# Allegro board DAQ_BACKPLANE.brd
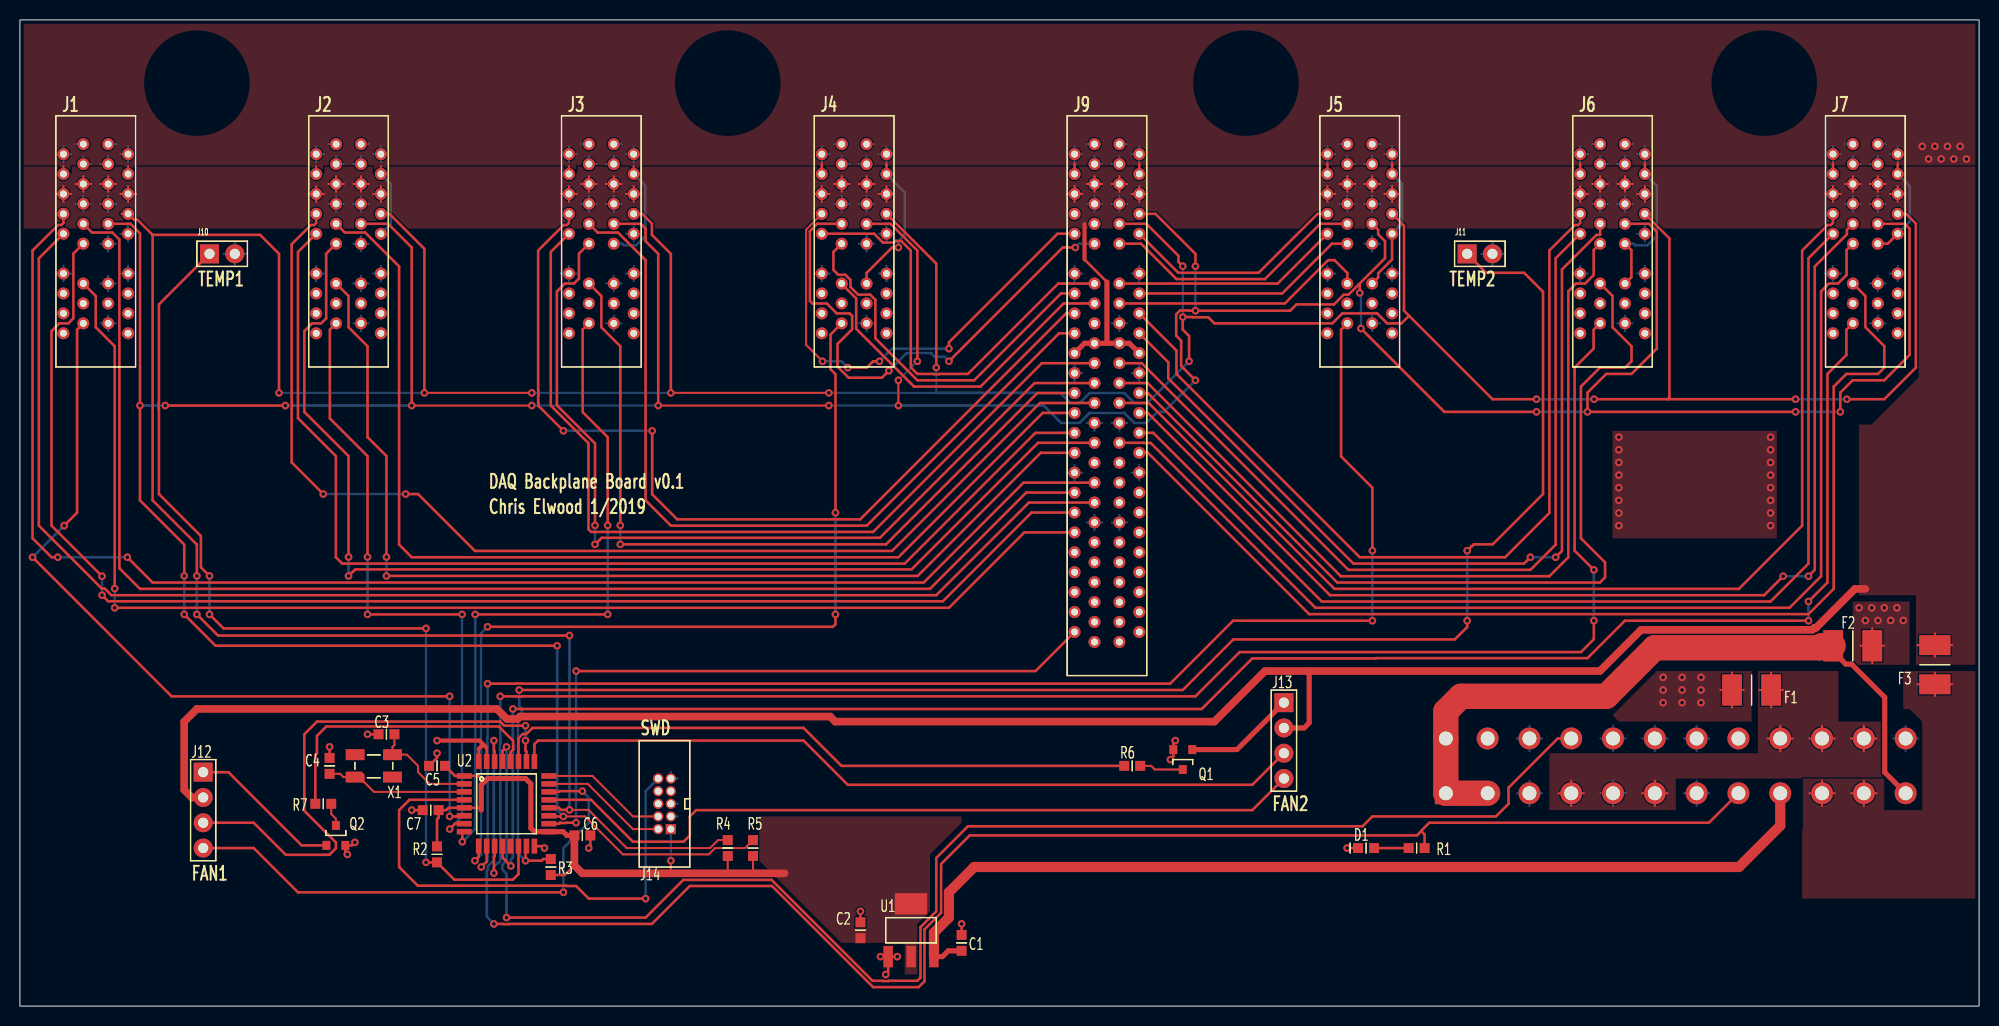
[diagram p0: board, top side]
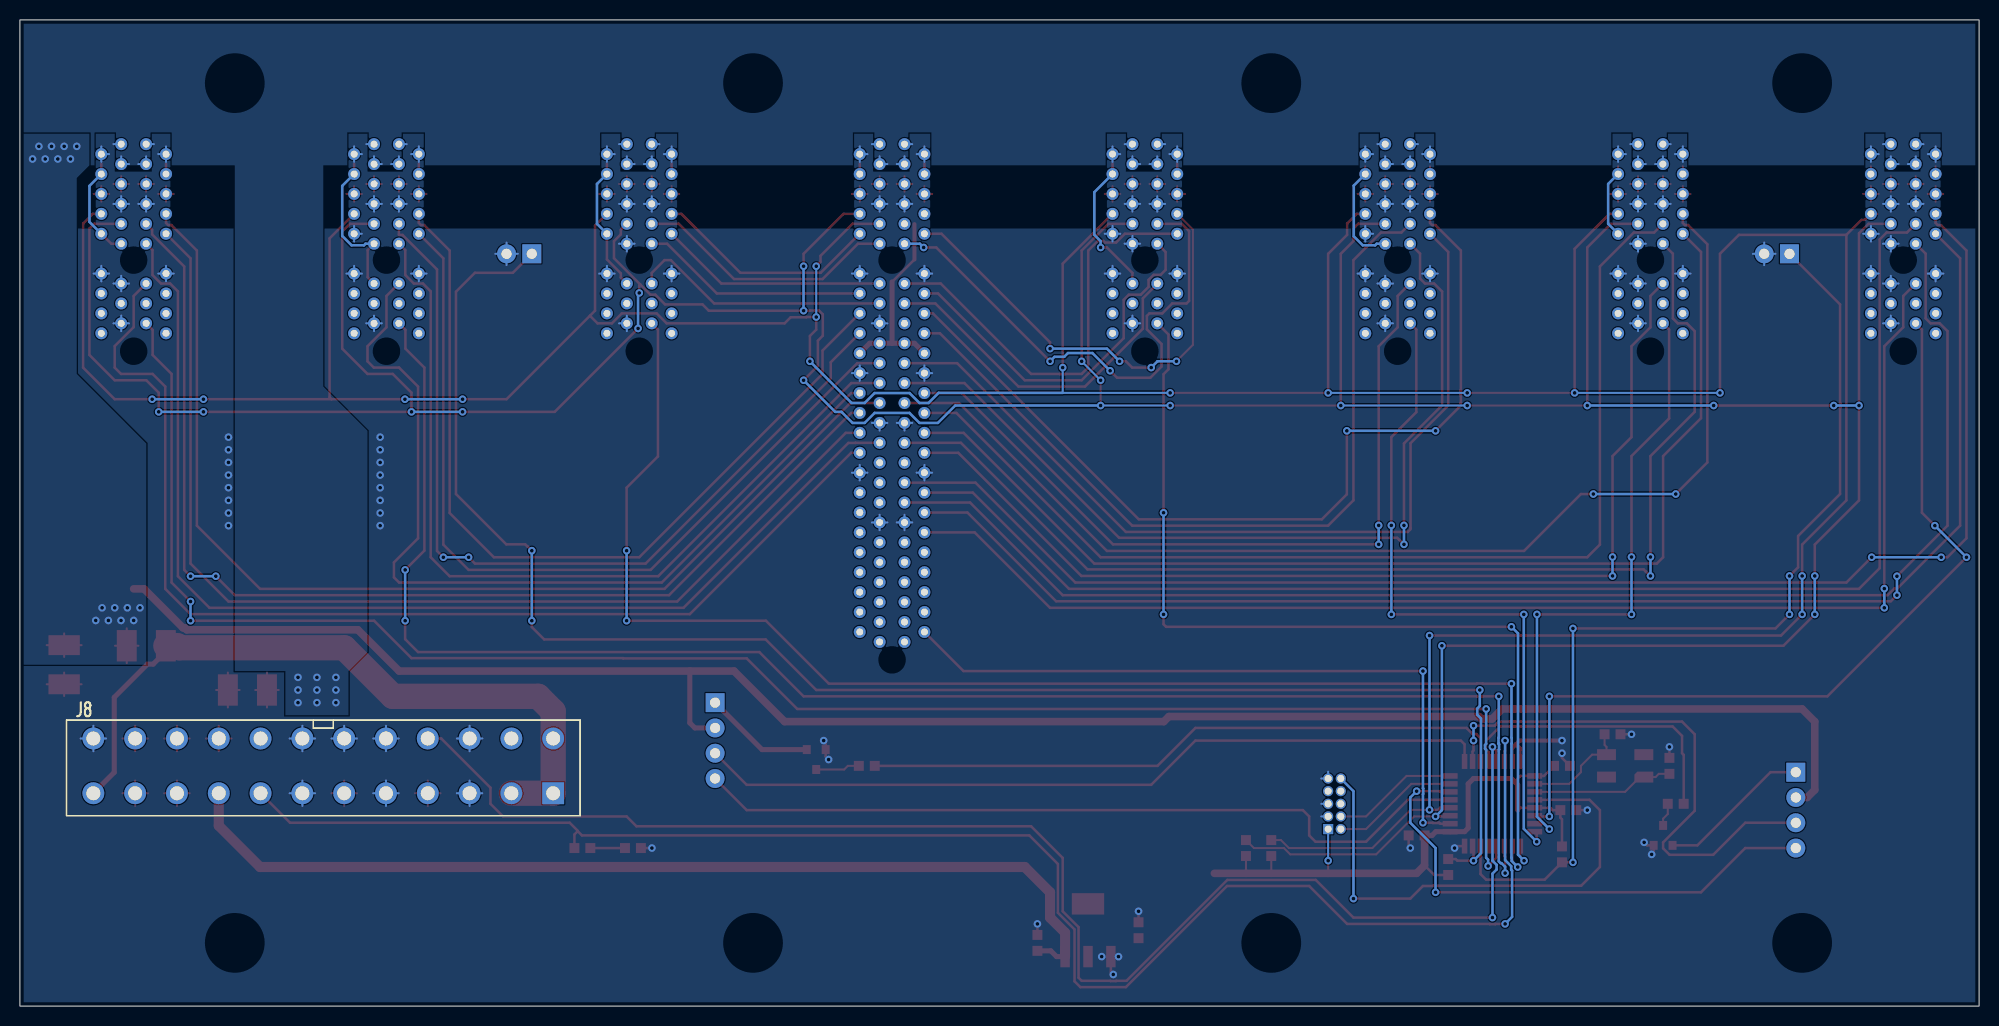
[diagram p1: board, bottom side, seen from below]

Outline 196.85 x 99.06 mm; copper layers: TOP, BOTTOM. Coordinates in mm from the lower left corner of the outline.
Outline path: rectangle 0,0 196.85,99.06

## Design rules (mm)
constraint set DEFAULT: min track width 0.203

## Placement (name value [footprint] x y rotation side)
C1  0.1uF  [CAP_0603]  94.61 6.35 90 top
C2  1uF  [CAP_0603]  84.45 7.62 90 top
C3  8pF  [CAP_0603]  36.83 27.3 0 top
C4  8pF  [CAP_0603]  31.11 24.13 270 top
C5  0.1uF  [CAP_0603]  41.91 24.13 180 top
C6  0.1uF  [CAP_0603]  56.51 17.15 0 top
C7  0.1uF  [CAP_0603]  41.27 19.69 180 top
D1  PWR_OK  [LED_0603]  135.25 15.88 0 top
F1  10A  [FUSE_0679H]  173.99 31.75 180 top
F2  10A  [FUSE_0679H]  184.15 36.2 0 top
F3  10A  [FUSE_0679H]  192.41 34.29 90 top
J1  DAQ_PCIE_TH_36  [CONN_PCIE_36_TH]  7.62 74.93 0 top
J2  DAQ_PCIE_TH_36  [CONN_PCIE_36_TH]  33.02 74.93 0 top
J3  DAQ_PCIE_TH_36  [CONN_PCIE_36_TH]  58.42 74.93 0 top
J4  DAQ_PCIE_TH_36  [CONN_PCIE_36_TH]  83.82 74.93 0 top
J5  DAQ_PCIE_TH_36  [CONN_PCIE_36_TH]  134.62 74.93 0 top
J6  DAQ_PCIE_TH_36  [CONN_PCIE_36_TH]  160.02 74.93 0 top
J7  DAQ_PCIE_TH_36  [CONN_PCIE_36_TH]  185.42 74.93 0 top
J8  ATX_PWR_24pin  [MINI-FIT_JR_24]  166.37 24.13 180 bottom
J9  DAQ_EDGE_98  [CONN_PCIE_98_TH]  109.22 74.93 0 top
J10  TEMP1  [HDR_1X2]  19.05 75.56 90 top
J11  TEMP2  [HDR_1X2]  145.41 75.56 90 top
J12  FAN1  [HDR_1X4]  18.41 23.5 0 top
J13  FAN2  [HDR_1X4]  127 30.48 0 top
J14  SWD_HEADER_SHD  [HDR_0P5IN_2X5_SHD]  64.77 20.32 180 top
NOREF  -  [unnamed]  123.19 92.71 0 top
NOREF#2  -  [unnamed]  175.26 92.71 0 top
NOREF#3  -  [unnamed]  17.78 92.71 0 top
NOREF#4  -  [unnamed]  71.12 92.71 0 top
NOREF#5  -  [unnamed]  123.19 6.35 0 top
NOREF#6  -  [unnamed]  17.78 6.35 0 top
NOREF#7  -  [unnamed]  175.26 6.35 0 top
NOREF#8  -  [unnamed]  71.12 6.35 0 top
Q1  DMN2075U  [SOT-23]  116.84 24.77 180 top
Q2  DMN2075U  [SOT-23]  31.75 17.15 0 top
R1  330  [RES_0603]  140.33 15.88 180 top
R2  10K  [RES_0603]  41.91 15.24 90 top
R3  10K  [RES_0603]  53.34 13.97 270 top
R4  4.7K  [RES_0603]  71.12 15.88 90 top
R5  4.7K  [RES_0603]  73.66 15.88 90 top
R6  1K  [RES_0603]  111.76 24.13 0 top
R7  1K  [RES_0603]  30.48 20.32 0 top
U1  LM1117MP-3,3  [SOT-223-3]  89.53 7.62 0 top
U2  STM32F0XXKXT  [QFP32]  48.89 20.32 0 top
X1  12 MHz  [CRYSTAL_5X3]  35.56 24.13 180 top

## Library data of the parts
C1-C7 = CAP NP
D1 = LED
F1-F3 = FUSE_SMT_0679H
J1-J7 = DAQ_PCIE_TH_36
J8 = ATX_PWR_24pin
J9 = DAQ_EDGE_98
J10 J11 = HDR_1X2
J12 J13 = HDR_1X4
J14 = SWD_HEADER_SHD
Q1 Q2 = DMN2075U
R1-R7 = RESISTOR
U1 = LM1117MP-3,3
U2 = STM32F0XXKXT
X1 = CRYSTAL_5X3_12MHZ

## Footprints (pads in the part's own frame, mm; a bottom-side part is the same pattern mirrored in y, then rotated)
CAP_0603
  rect 1x1 smd: 1(-0.8,0) 2(0.8,0)
CONN_PCIE_36_TH
  round 0 hole 2.35 unplated: (0,0) (0,-9.15)
  round 1.2 hole 0.7: A1(1.25,11.65) A2(3.25,10.65) A3(1.25,9.65) A4(3.25,8.65) A5(1.25,7.65) A6(3.25,6.65) A7(1.25,5.65) A8(3.25,4.65) A9(1.25,3.65) A10(3.25,2.65) A11(1.25,1.65) A12(3.25,-1.35) A13(1.25,-2.35) A14(3.25,-3.35) A15(1.25,-4.35) A16(3.25,-5.35) A17(1.25,-6.35) A18(3.25,-7.35) B1(-1.25,11.65) B2(-3.25,10.65) B3(-1.25,9.65) B4(-3.25,8.65) B5(-1.25,7.65) B6(-3.25,6.65) B7(-1.25,5.65) B8(-3.25,4.65) B9(-1.25,3.65) B10(-3.25,2.65) B11(-1.25,1.65) B12(-3.25,-1.35) B13(-1.25,-2.35) B14(-3.25,-3.35) B15(-1.25,-4.35) B16(-3.25,-5.35) B17(-1.25,-6.35) B18(-3.25,-7.35)
CONN_PCIE_98_TH
  round 0 hole 2.35 unplated: (0,0) (0,-40.15)
  round 1.2 hole 0.7: A1(1.25,11.65) A2(3.25,10.65) A3(1.25,9.65) A4(3.25,8.65) A5(1.25,7.65) A6(3.25,6.65) A7(1.25,5.65) A8(3.25,4.65) A9(1.25,3.65) A10(3.25,2.65) A11(1.25,1.65) A12(3.25,-1.35) A13(1.25,-2.35) A14(3.25,-3.35) A15(1.25,-4.35) A16(3.25,-5.35) A17(1.25,-6.35) A18(3.25,-7.35) A19(1.25,-8.35) A20(3.25,-9.35) A21(1.25,-10.35) A22(3.25,-11.35) A23(1.25,-12.35) A24(3.25,-13.35) A25(1.25,-14.35) A26(3.25,-15.35) A27(1.25,-16.35) A28(3.25,-17.35) A29(1.25,-18.35) A30(3.25,-19.35) A31(1.25,-20.35) A32(3.25,-21.35) A33(1.25,-22.35) A34(3.25,-23.35) A35(1.25,-24.35) A36(3.25,-25.35) A37(1.25,-26.35) A38(3.25,-27.35) A39(1.25,-28.35) A40(3.25,-29.35) A41(1.25,-30.35) A42(3.25,-31.35) A43(1.25,-32.35) A44(3.25,-33.35) A45(1.25,-34.35) A46(3.25,-35.35) A47(1.25,-36.35) A48(3.25,-37.35) A49(1.25,-38.35) B1(-1.25,11.65) B2(-3.25,10.65) B3(-1.25,9.65) B4(-3.25,8.65) B5(-1.25,7.65) B6(-3.25,6.65) B7(-1.25,5.65) B8(-3.25,4.65) B9(-1.25,3.65) B10(-3.25,2.65) B11(-1.25,1.65) B12(-3.25,-1.35) B13(-1.25,-2.35) B14(-3.25,-3.35) B15(-1.25,-4.35) B16(-3.25,-5.35) B17(-1.25,-6.35) B18(-3.25,-7.35) B19(-1.25,-8.35) B20(-3.25,-9.35) B21(-1.25,-10.35) B22(-3.25,-11.35) B23(-1.25,-12.35) B24(-3.25,-13.35) B25(-1.25,-14.35) B26(-3.25,-15.35) B27(-1.25,-16.35) B28(-3.25,-17.35) B29(-1.25,-18.35) B30(-3.25,-19.35) B31(-1.25,-20.35) B32(-3.25,-21.35) B33(-1.25,-22.35) B34(-3.25,-23.35) B35(-1.25,-24.35) B36(-3.25,-25.35) B37(-1.25,-26.35) B38(-3.25,-27.35) B39(-1.25,-28.35) B40(-3.25,-29.35) B41(-1.25,-30.35) B42(-3.25,-31.35) B43(-1.25,-32.35) B44(-3.25,-33.35) B45(-1.25,-34.35) B46(-3.25,-35.35) B47(-1.25,-36.35) B48(-3.25,-37.35) B49(-1.25,-38.35)
CRYSTAL_5X3
  custom 1.9x1.1 smd: 1(1.875,1.125)
  rect 1.9x1.1 smd: 2(-1.875,1.125) 3(-1.875,-1.125) 4(1.875,-1.125)
FUSE_0679H
  rect 2x3.15 smd: 1(-1.965,0) 2(1.965,0)
HDR_0P5IN_2X5_SHD
  rect 1.016x1.016 hole 0.711: 1(-0.635,2.54)
  round 1.016 hole 0.711: 2(0.635,2.54) 3(-0.635,1.27) 4(0.635,1.27) 5(-0.635,0) 6(0.635,0) 7(-0.635,-1.27) 8(0.635,-1.27) 9(-0.635,-2.54) 10(0.635,-2.54)
HDR_1X2
  rect 1.905x1.905 hole 1.016: 1(0,0)
  round 1.905 hole 1.016: 2(0,-2.54)
HDR_1X4
  rect 1.905x1.905 hole 1.016: 1(0,0)
  round 1.905 hole 1.016: 2(0,-2.54) 3(0,-5.08) 4(0,-7.62)
LED_0603
  rect 1x1 smd: 1(-0.8,0) 2(0.8,0)
MINI-FIT_JR_24
  rect 2.2x2.2 hole 1.4: 1(23.1,-2.75)
  round 2.2 hole 1.4: 2(18.9,-2.75) 3(14.7,-2.75) 4(10.5,-2.75) 5(6.3,-2.75) 6(2.1,-2.75) 7(-2.1,-2.75) 8(-6.3,-2.75) 9(-10.5,-2.75) 10(-14.7,-2.75) 11(-18.9,-2.75) 12(-23.1,-2.75) 13(23.1,2.75) 14(18.9,2.75) 15(14.7,2.75) 16(10.5,2.75) 17(6.3,2.75) 18(2.1,2.75) 19(-2.1,2.75) 20(-6.3,2.75) 21(-10.5,2.75) 22(-14.7,2.75) 23(-18.9,2.75) 24(-23.1,2.75)
QFP32
  rect 1.499x0.559 smd: 1(-4.25,2.8) 2(-4.25,2) 3(-4.25,1.2) 4(-4.25,0.4) 5(-4.25,-0.4) 6(-4.25,-1.2) 7(-4.25,-2) 8(-4.25,-2.8) 17(4.25,-2.8) 18(4.25,-2) 19(4.25,-1.2) 20(4.25,-0.4) 21(4.25,0.4) 22(4.25,1.2) 23(4.25,2) 24(4.25,2.8)
  rect 0.559x1.499 smd: 9(-2.8,-4.25) 10(-2,-4.25) 11(-1.2,-4.25) 12(-0.4,-4.25) 13(0.4,-4.25) 14(1.2,-4.25) 15(2,-4.25) 16(2.8,-4.25) 25(2.8,4.25) 26(2,4.25) 27(1.2,4.25) 28(0.4,4.25) 29(-0.4,4.25) 30(-1.2,4.25) 31(-2,4.25) 32(-2.8,4.25)
RES_0603
  rect 1x1 smd: 1(-0.8,0) 2(0.8,0)
SOT-23
  rect 0.8x0.9 smd: 1(-0.95,-1) 2(0,1) 3(0.95,-1)
SOT-223-3
  rect 0.95x2.15 smd: 1(-2.3,-2.65) 2(0,-2.65) 3(2.3,-2.65)
  rect 3.25x2.15 smd: 4(0,2.65)
unnamed
  round 0 hole 3.7: (0,0)

## Nets
3V3: F2.2 J1.A4 J1.B4 J2.A4 J2.A10 J2.B4 J3.A4 J3.A11 J3.B4 J4.A4 J4.A13 J4.B4 J5.A4 J5.A10 J5.A13 J5.B4 J6.A4 J6.A11 J6.A13 J6.B4 J7.A4 J7.A10 J7.A11 J7.B4 J9.A4 J9.B4
3V3_STBY: C2.1 C5.1 C6.1 C7.1 J14.1(VTREF) R2.2 R3.2 R4.1 R5.1 U1.2 U1.4(OUT2) U2.1 U2.5(VDDA) U2.17
5V0: F1.2 J1.A3 J1.B3 J2.A3 J2.B3 J3.A3 J3.B3 J4.A3 J4.B3 J5.A3 J5.B3 J6.A3 J6.B3 J7.A3 J7.B3 J9.A3 J9.B3
5V0_STBY: C1.1 J8.9 U1.3
12V0: F3.2 J1.A5 J1.A6 J1.B5 J1.B6 J2.A5 J2.A6 J2.B5 J2.B6 J3.A5 J3.A6 J3.B5 J3.B6 J4.A5 J4.A6 J4.B5 J4.B6 J5.A5 J5.A6 J5.B5 J5.B6 J6.A5 J6.A6 J6.B5 J6.B6 J7.A5 J7.A6 J7.B5 J7.B6 J9.A5 J9.A6 J9.A19 J9.A20 J9.B5 J9.B6 J9.B19 J9.B20 J12.2 J13.2
GND: C1.2 C2.2 C3.1 C4.1 C5.2 C6.2 C7.2 D1.1(CATHODE) J1.A1 J1.A2 J1.A7 J1.A10 J1.A11 J1.A12 J1.A13 J1.A17 J1.B1 J1.B2 J1.B7 J1.B12 J2.A1 J2.A2 J2.A7 J2.A11 J2.A12 J2.A13 J2.A17 J2.B1 J2.B2 J2.B7 J2.B12 J3.A1 J3.A2 J3.A7 J3.A10 J3.A12 J3.A13 J3.A17 J3.B1 J3.B2 J3.B7 J3.B12 J4.A1 J4.A2 J4.A7 J4.A10 J4.A11 J4.A12 J4.A17 J4.B1 J4.B2 J4.B7 J4.B12 J5.A1 J5.A2 J5.A7 J5.A11 J5.A12 J5.A17 J5.B1 J5.B2 J5.B7 J5.B12 J6.A1 J6.A2 J6.A7 J6.A10 J6.A12 J6.A17 J6.B1 J6.B2 J6.B7 J6.B12 J7.A1 J7.A2 J7.A7 J7.A12 J7.A13 J7.A17 J7.B1 J7.B2 J7.B7 J7.B12 J8.3 J8.5 J8.7 J8.15 J8.17 J8.18 J8.19 J8.24 J9.A1 J9.A2 J9.A7 J9.A12 J9.A17 J9.A22 J9.A27 J9.A32 J9.A37 J9.B1 J9.B2 J9.B7 J9.B12 J9.B22 J9.B27 J9.B32 J9.B37 J10.2 J11.2 J14.3 J14.5 J14.9 Q1.3(S) Q2.3(S) U1.1 U2.16 U2.31 U2.32
CS_0: J1.B11 J9.B36
CS_1: J2.B11 J9.B29
CS_2: J3.B11 J9.B23
CS_3: J4.B11 J9.B14
CS_4: J5.B11 J9.A14
CS_5: J6.B11 J9.A23
CS_6: J7.B11 J9.A29
FAN_1: R7.1 U2.28
FAN_2: R6.1 U2.27
INT_0: J1.B13 J9.B38
INT_1: J2.B13 J9.B30
INT_2: J3.B13 J9.B24
INT_3: J4.B13 J9.B15
INT_4: J5.B13 J9.A15
INT_5: J6.B13 J9.A24
INT_6: J7.B13 J9.A30
MISO_0: J1.B9 J9.B34
MISO_1: J2.B9 J9.B26
MISO_2: J3.B9 J9.B18
MISO_3: J4.B9 J9.B11
MISO_4: J5.B9 J9.A11
MISO_5: J6.B9 J9.A18
MISO_6: J7.B9 J9.A26
MOSI_0: J1.B8 J9.B33
MOSI_1: J2.B8 J9.B25
MOSI_2: J3.B8 J9.B16
MOSI_3: J4.B8 J9.B10
MOSI_4: J5.B8 J9.A10
MOSI_5: J6.B8 J9.A16
MOSI_6: J7.B8 J9.A25
NEG_12V0: J8.14
NRST: J14.10 U2.4
PRSNT_0: J1.B17 U2.6
PRSNT_1: J2.B17 U2.7
PRSNT_2: J3.B17 U2.8
PRSNT_3: J4.B17 U2.9
PRSNT_4: J5.B17 U2.10
PRSNT_5: J6.B17 U2.11
PRSNT_6: J7.B17 U2.12
PRSNT_MSTR: J9.B48 U2.18
PS_ON: J8.16(P\S\_\O\N\) U2.29
PWM_1: J12.4 U2.22
PWM_2: J13.4 U2.21
PWR_OK: J8.8 R1.1 U2.30
SCK_0: J1.B10 J9.B35
SCK_1: J2.B10 J9.B28
SCK_2: J3.B10 J9.B21
SCK_3: J4.B10 J9.B13
SCK_4: J5.B10 J9.A13
SCK_5: J6.B10 J9.A21
SCK_6: J7.B10 J9.A28
SCL: J1.A9 J2.A9 J3.A9 J4.A9 J5.A9 J6.A9 J7.A9 J9.A8 R5.2 U2.19
SDA: J1.A8(SDA) J2.A8(SDA) J3.A8(SDA) J4.A8(SDA) J5.A8(SDA) J6.A8(SDA) J7.A8(SDA) J9.A9(SDA) R4.2 U2.20
SWCLK: J14.4 U2.24
SWDIO: J14.2 U2.23
TACH_1: J12.3 U2.26
TACH_2: J13.3 U2.25
TEMP_1: J10.1 R2.1 U2.14
TEMP_2: J11.1 R3.1 U2.15
N16591: F2.1 J8.1 J8.2 J8.12 J8.13
N16670: F1.1 J8.4 J8.6 J8.21 J8.22 J8.23
N16786: F3.1 J8.10 J8.11
N17268: D1.2 R1.2
N21003: C4.2 U2.3 X1.1
N21021: C3.2 U2.2 X1.3
N84664: J13.1 Q1.1
N84732: J12.1 Q2.1
N86028: Q1.2 R6.2
N86032: Q2.2 R7.2

Pads without a net: J1 A14 A15 A16 A18 B14 B15 B16 B18; J2 A14 A15 A16 A18 B14 B15 B16 B18; J3 A14 A15 A16 A18 B14 B15 B16 B18; J4 A14 A15 A16 A18 B14 B15 B16 B18; J5 A14 A15 A16 A18 B14 B15 B16 B18; J6 A14 A15 A16 A18 B14 B15 B16 B18; J7 A14 A15 A16 A18 B14 B15 B16 B18; J8 20; J9 A31 A33 A34 A35 A36 A38 A39 A40 A41 A42 A43 A44 A45 A46 A47 A48 A49 B8 B9 B17 B31 B39 B40 B41 B42 B43 B44 B45 B46 B47 B49; J14 6 7 8; U2 13; X1 2 4

## Via types
v1: diameter 0.762, hole 0.381, TOP to BOTTOM, 176 vias

## Routing (per net, layer and track width the routed paths; a pad name or vN(x,y) marks a point on that pad's centre or on a via; arc(x,y) is an arc through that point)
3V3: length 88.8
  TOP w0.203: F2.2 186.11,37.95 ; F2.2 187.29,36.2 ; F2.2 186.11,34.44 ; F2.2 184.94,36.2 ; J2.A4 36.27,84.36 ; J1.B4 4.37,84.36 ; J2.B4 29.77,84.36 ; J3.A4 61.67,84.36 ; J3.B4 55.17,84.36 ; J1.A4 10.87,84.36
  TOP w0.254: J9.A4 112.47,84.63 ; J7.A10 187.67,76.58 J7.A11 ; J4.A4 87.07,84.63 ; J7.A4 188.67,84.63 ; J5.B4 131.37,84.63 ; J5.A13 136.47,73.18 136.47,73.61 137.87,75 J5.A10 ; J6.A11 161.91,75.94 161.91,73.22 J6.A13 ; J4.B4 80.57,84.63 ; v1(88.26,76.2) 87.63,76.2 85.07,73.64 J4.A13 ; J9.B4 105.97,84.63 ; J7.B4 182.17,84.63 ; J5.A4 137.87,84.63 ; J6.A4 163.27,84.63 ; J6.B4 156.77,84.63
  BOTTOM w0.254: J2.A10 37.27,78.58 37.27,82.58 J2.A4 ; J6.A11 162.12,76.58 162.28,76.42 163.52,76.42 164.47,77.36 164.47,82.38 J6.A4 ; J7.A10 189.87,78.78 189.87,82.38 J7.A4 ; J5.A4 138.87,82.58 138.87,78.58 J5.A10 ; J3.A4 62.83,82.42 62.83,77.32 61.92,76.42 60.68,76.42 60.52,76.58 J3.A11 ; v1(88.26,76.2) 88.26,76.84 88.9,77.47 88.9,81.75 J4.A4
  vias: v1(184.78,40.01) v1(185.42,38.73) v1(186.06,40.01) v1(186.69,38.73) v1(187.32,40.01) v1(187.96,38.73) v1(188.59,40.01) v1(189.23,38.73) v1(191.13,86.36) v1(191.77,85.09) v1(192.41,86.36) v1(193.04,85.09) v1(193.68,86.36) v1(194.31,85.09) v1(194.94,86.36) v1(195.58,85.09)
3V3_STBY: length 65.1
  TOP w0.203: R4.1 71.12,13.34 ; R5.1 73.66,13.34 ; v1(65.41,14.61) 65.41,13.34
  TOP w0.254: 46.67,22.54 46.09,23.12 U2.1 43.72,23.12 C5.1 ; 55.71,14.14 54.75,13.17 R3.2 ; 46.35,19.69 46.12,19.92 U2.5 43.06,19.92 42.83,19.69 C7.1 42.08,18.93 41.91,18.77 R2.2
  TOP w0.508: C6.1 54.96,17.15 54.59,17.52 U2.17 51.7,17.52 51.34,17.88 51.34,22.32 50.8,22.86 46.99,22.86 46.35,22.23 46.35,19.69
  TOP w0.762: C6.1 55.71,14.14 56.51,13.34 76.83,13.34
  BOTTOM w0.203: J14.1 v1(65.41,14.61)
5V0: length 30.8
  TOP w0.203: F1.2 172.03,33.5 ; F1.2 172.03,30 ; F1.2 170.85,31.75 ; F1.2 173.2,31.75
  BOTTOM w0.203: 58.89,84.58 J3.A3 59.67,85.36 ; 134.15,84.58 J5.B3 133.37,85.36 ; 8.87,85.36 J1.A3 8.09,84.58 ; 159.55,84.58 J6.B3 158.77,85.36 ; 84.29,84.58 J4.A3 85.07,85.36 ; 6.37,85.36 J1.B3 7.15,84.58 ; 57.17,85.36 J3.B3 57.95,84.58 ; 110.47,85.36 J9.A3 109.69,84.58 ; 135.87,85.36 J5.A3 135.09,84.58 ; 31.77,85.36 J2.B3 32.55,84.58 ; 186.67,85.36 J7.A3 185.89,84.58 ; 107.97,85.36 J9.B3 108.75,84.58 ; 161.27,85.36 J6.A3 160.49,84.58 ; 82.57,85.36 J4.B3 83.35,84.58 ; 184.95,84.58 J7.B3 184.17,85.36 ; 33.49,84.58 J2.A3 34.27,85.36
  vias: v1(165.1,33.02) v1(165.1,31.75) v1(165.1,30.48) v1(167,33.02) v1(167,31.75) v1(167,30.48) v1(168.91,33.02) v1(168.91,31.75) v1(168.91,30.48)
5V0_STBY: length 99.7
  TOP w0.508: U1.3 92.69,4.97 93.27,5.55 C1.1
  TOP w1.016: U1.3 91.83,7.38 93.34,8.89 93.34,11.43 95.88,13.97 172.72,13.97 176.87,18.12 J8.9
12V0: length 318.4
  TOP w0.203: J5.A5 135.87,83.36 ; J5.A5 135.09,82.58 ; J5.A5 136.65,82.58 ; J5.A5 135.87,81.8 ; J3.A6 61.67,82.36 ; J3.A6 61.67,80.8 ; J3.A6 62.45,81.58 ; J3.A6 60.89,81.58 ; 10.87,80.8 J1.A6 ; J1.A6 10.87,82.36 ; J1.A6 10.09,81.58 ; J1.A6 11.65,81.58 ; F3.2 194.16,36.25 ; F3.2 192.41,37.43 ; F3.2 192.41,35.08 ; F3.2 190.65,36.25 ; J7.A6 188.67,82.36 ; J7.A6 189.45,81.58 ; J7.A6 187.89,81.58 ; J7.A6 188.67,80.8 ; J9.A6 113.25,81.58 ; J9.A6 112.47,82.36 ; J9.A6 111.69,81.58 ; J9.A6 112.47,80.8 ; 183.39,82.58 J7.B5 ; J7.B5 184.95,82.58 ; J7.B5 184.17,83.36 ; J7.B5 184.17,81.8 ; J9.A5 111.25,82.58 ; J9.A5 110.47,81.8 ; J9.A5 109.69,82.58 ; J9.A5 110.47,83.36 ; J7.B6 182.17,82.36 ; J7.B6 181.39,81.58 ; J7.B6 182.95,81.58 ; J7.B6 182.17,80.8 ; J6.B6 157.55,81.58 ; J6.B6 155.99,81.58 ; J6.B6 156.77,82.36 ; J6.B6 156.77,80.8 ; 6.37,81.8 J1.B5 ; J1.B5 6.37,83.36 ; J1.B5 5.59,82.58 ; J1.B5 7.15,82.58 ; 79.79,81.58 J4.B6 ; J4.B6 80.57,82.36 ; J4.B6 80.57,80.8 ; J4.B6 81.35,81.58 ; J6.A5 162.05,82.58 ; J6.A5 161.27,83.36 ; J6.A5 160.49,82.58 ; J6.A5 161.27,81.8 ; J9.B6 106.75,81.58 ; J9.B6 105.97,82.36 ; J9.B6 105.19,81.58 ; J9.B6 105.97,80.8 ; 107.97,81.8 J9.B5 ; J9.B5 107.19,82.58 ; J9.B5 107.97,83.36 ; J9.B5 108.75,82.58 ; J4.A5 85.85,82.58 ; J4.A5 85.07,83.36 ; J4.A5 84.29,82.58 ; J4.A5 85.07,81.8 ; J6.B5 159.55,82.58 ; J6.B5 158.77,83.36 ; J6.B5 157.99,82.58 ; J6.B5 158.77,81.8 ; 163.27,80.8 J6.A6 ; J6.A6 162.49,81.58 ; J6.A6 164.05,81.58 ; J6.A6 163.27,82.36 ; 35.49,81.58 J2.A6 ; J2.A6 36.27,82.36 ; J2.A6 36.27,80.8 ; J2.A6 37.05,81.58 ; J7.A5 187.45,82.58 ; J7.A5 186.67,81.8 ; J7.A5 186.67,83.36 ; J7.A5 185.89,82.58 ; 82.57,81.8 J4.B5 ; J4.B5 82.57,83.36 ; J4.B5 83.35,82.58 ; J4.B5 81.79,82.58 ; 87.07,80.8 J4.A6 ; J4.A6 86.29,81.58 ; J4.A6 87.07,82.36 ; J4.A6 87.85,81.58 ; 137.09,81.58 J5.A6 ; J5.A6 137.87,82.36 ; J5.A6 137.87,80.8 ; J5.A6 138.65,81.58 ; 57.17,81.8 J3.B5 ; J3.B5 57.95,82.58 ; J3.B5 57.17,83.36 ; J3.B5 56.39,82.58 ; J5.B6 131.37,82.36 ; J5.B6 131.37,80.8 ; J5.B6 130.59,81.58 ; J5.B6 132.15,81.58 ; 58.89,82.58 J3.A5 ; J3.A5 59.67,83.36 ; J3.A5 60.45,82.58 ; J3.A5 59.67,81.8 ; 3.59,81.58 J1.B6 ; J1.B6 4.37,80.8 ; J1.B6 5.15,81.58 ; J1.B6 4.37,82.36 ; J2.B5 32.55,82.58 ; J2.B5 31.77,81.8 ; J2.B5 30.99,82.58 ; J2.B5 31.77,83.36 ; 8.87,81.8 J1.A5 ; J1.A5 8.09,82.58 ; J1.A5 8.87,83.36 ; J1.A5 9.65,82.58 ; J2.B6 29.77,82.36 ; J2.B6 29.77,80.8 ; J2.B6 28.99,81.58 ; J2.B6 30.55,81.58 ; 34.27,81.8 J2.A5 ; J2.A5 35.05,82.58 ; J2.A5 34.27,83.36 ; J2.A5 33.49,82.58 ; 133.37,81.8 J5.B5 ; J5.B5 134.15,82.58 ; J5.B5 133.37,83.36 ; J5.B5 132.59,82.58 ; 55.17,80.8 J3.B6 ; J3.B6 55.95,81.58 ; J3.B6 55.17,82.36 ; J3.B6 54.39,81.58
  TOP w0.254: 106.97,74.99 109.22,72.74
  TOP w0.406: 106.97,78.54 106.97,74.99
  TOP w0.508: J9.B20 106.97,66.58 J9.B19 109.22,66.58 ; 109.22,72.74 109.22,66.58 ; 109.22,66.58 J9.A19 111.47,66.58 J9.A20 ; J13.2 129.03,27.94 129.54,28.45 129.54,33.66
  TOP w0.762: 185.42,41.91 184.38,41.91 180.47,38 180.29,38 180.08,37.8 162.89,37.8 158.75,33.66 125.09,33.66 120.01,28.58 81.91,28.58 81.41,29.08 50.24,29.08 50,28.84 48.92,28.84 47.92,29.85 17.78,29.85 16.51,28.58 16.51,21.72 17.27,20.96 J12.2
GND: length 312.4
  TOP w0.254: C3.1 v1(34.92,27.3) ; C5.2 41.91,24.93 v1(41.91,25.4) ; v1(52.7,15.88) 52.51,16.07 U2.16 ; 46.09,25.84 U2.32 ; C1.2 v1(94.61,8.26) ; C4.1 v1(31.11,26.04) ; C6.2 57.32,16.04 v1(57.15,15.88) ; C7.2 v1(39.37,19.69) ; v1(116.09,26.67) 115.89,26.47 Q1.3 115.89,25.06 v1(115.59,24.77) ; U1.1 v1(88.16,4.97) ; U1.1 87.24,3.42 v1(86.99,3.18) ; U1.1 v1(86.47,4.97) ; C2.2 v1(84.45,9.52) ; v1(33.66,16.45) 33.35,16.15 Q2.3 32.7,15.44 v1(32.9,15.24) ; U2.31 46.9,25.94 ; D1.1 v1(133.35,15.88)
  TOP w0.406: 46.54,26.29 46.17,26.67 v1(41.91,26.67) ; 46.54,26.29 46.09,25.84 ; 46.54,26.29 46.9,25.94
  BOTTOM w0.203: J4.B2 80.57,86.36 ; J4.B2 80.57,84.8 ; J4.B2 81.35,85.58 ; 111.69,73.58 J9.A12 ; J9.A12 112.47,74.36 ; J9.A12 113.25,73.58 ; J9.A12 112.47,72.8 ; 156.77,72.8 J6.B12 ; J6.B12 155.99,73.58 ; J6.B12 156.77,74.36 ; J6.B12 157.55,73.58 ; J9.A17 111.25,68.58 ; J9.A17 109.69,68.58 ; J9.A17 110.47,69.36 ; J9.A17 110.47,67.8 ; 112.47,52.8 J9.A32 ; J9.A32 111.69,53.58 ; J9.A32 112.47,54.36 ; J9.A32 113.25,53.58 ; J5.B7 134.15,80.58 ; J5.B7 133.37,81.36 ; J5.B7 133.37,79.8 ; J5.B7 132.59,80.58 ; 158.77,79.8 J6.B7 ; J6.B7 159.55,80.58 ; J6.B7 158.77,81.36 ; J6.B7 157.99,80.58 ; J9.B2 105.97,86.36 ; J9.B2 106.75,85.58 ; J9.B2 105.97,84.8 ; J1.B12 4.37,74.36 ; J1.B12 5.15,73.58 ; J1.B12 3.59,73.58 ; J1.B12 4.37,72.8 ; 86.29,85.58 J4.A2 ; J4.A2 87.07,86.36 ; J4.A2 87.07,84.8 ; J5.A7 135.87,81.36 ; J5.A7 135.09,80.58 ; J5.A7 136.65,80.58 ; J5.A7 135.87,79.8 ; 156.77,84.8 J6.B2 ; J6.B2 156.77,86.36 ; J6.B2 157.55,85.58 ; J4.A7 85.85,80.58 ; J4.A7 85.07,81.36 ; J4.A7 84.29,80.58 ; J4.A7 85.07,79.8 ; J9.B32 106.75,53.58 ; J9.B32 105.19,53.58 ; J9.B32 105.97,54.36 ; J9.B32 105.97,52.8 ; 160.07,20.1 J8.5 ; J8.5 158.79,21.38 ; J8.5 160.07,22.66 ; J8.5 161.35,21.38 ; J3.A17 60.45,68.58 ; J3.A17 59.67,69.36 ; J3.A17 59.67,67.8 ; J3.A17 58.89,68.58 ; 84.29,76.58 J4.A11 ; J4.A11 85.85,76.58 ; J4.A11 85.07,77.36 ; J4.A11 85.07,75.8 ; J2.B12 30.55,73.58 ; J2.B12 28.99,73.58 ; J2.B12 29.77,72.8 ; J2.B12 29.77,74.36 ; 157.99,86.58 J6.B1 ; 130.59,73.58 J5.B12 ; J5.B12 131.37,72.8 ; J5.B12 131.37,74.36 ; J5.B12 132.15,73.58 ; 135.87,67.8 J5.A17 ; J5.A17 135.87,69.36 ; J5.A17 136.65,68.58 ; J1.B2 5.15,85.58 ; J1.B2 4.37,86.36 ; J1.B2 4.37,84.8 ; 151.67,25.6 J8.15 ; J8.15 151.67,28.16 ; J8.15 150.39,26.88 ; J8.15 152.95,26.88 ; J2.A12 37.05,73.58 ; J2.A12 35.49,73.58 ; J2.A12 36.27,72.8 ; J2.A12 36.27,74.36 ; J4.B12 80.57,74.36 ; J4.B12 80.57,72.8 ; J4.B12 79.79,73.58 ; J4.B12 81.35,73.58 ; J2.A2 36.27,86.36 ; J2.A2 35.49,85.58 ; J2.A2 36.27,84.8 ; J5.A12 137.87,74.36 ; J5.A12 137.09,73.58 ; J5.A12 137.87,72.8 ; J5.A12 138.65,73.58 ; J1.A17 9.65,68.58 ; J1.A17 8.09,68.58 ; J1.A17 8.87,69.36 ; J1.A17 8.87,67.8 ; J9.B37 107.97,49.36 ; J9.B37 107.19,48.58 ; J9.B37 108.75,48.58 ; J9.B37 107.97,47.8 ; 188.19,26.88 J8.24 ; J8.24 190.75,26.88 ; J8.24 189.47,25.6 ; J8.24 189.47,28.16 ; J4.B7 83.35,80.58 ; J4.B7 82.57,81.36 ; J4.B7 82.57,79.8 ; J4.B7 81.79,80.58 ; 167.19,26.88 J8.19 ; J8.19 168.47,28.16 ; J8.19 168.47,25.6 ; J8.19 169.75,26.88 ; 112.47,84.8 J9.A2 ; J9.A2 111.69,85.58 ; J9.A2 112.47,86.36 ; J4.A1 85.85,86.58 ; 10.09,85.58 J1.A2 ; J1.A2 10.87,86.36 ; J1.A2 10.87,84.8 ; J6.A10 163.27,78.36 ; J6.A10 163.27,76.8 ; J6.A10 162.49,77.58 ; 186.67,79.8 J7.A7 ; J7.A7 187.45,80.58 ; J7.A7 186.67,81.36 ; J7.A7 185.89,80.58 ; 6.37,79.8 J1.B7 ; J1.B7 5.59,80.58 ; J1.B7 6.37,81.36 ; J1.B7 7.15,80.58 ; 167.19,21.38 J8.7 ; J8.7 169.75,21.38 ; J8.7 168.47,22.66 ; J8.7 168.47,20.1 ; 33.49,68.58 J2.A17 ; J2.A17 34.27,69.36 ; J2.A17 34.27,67.8 ; J2.A17 35.05,68.58 ; J6.A12 163.27,74.36 ; J6.A12 163.27,72.8 ; J6.A12 164.05,73.58 ; J6.A12 162.49,73.58 ; J9.B12 106.75,73.58 ; J9.B12 105.97,74.36 ; J9.B12 105.97,72.8 ; J9.B12 105.19,73.58 ; 60.89,85.58 J3.A2 ; J3.A2 61.67,84.8 ; J3.A2 61.67,86.36 ; 8.87,71.8 J1.A13 ; J1.A13 8.87,73.36 ; J1.A13 8.09,72.58 ; J1.A13 9.65,72.58 ; J3.B12 55.17,74.36 ; J3.B12 55.17,72.8 ; J3.B12 55.95,73.58 ; J3.B12 54.39,73.58 ; J11.2 147.95,76.7 ; J11.2 149.09,75.56 ; J11.2 147.95,74.43 ; J11.2 146.82,75.56 ; 85.07,67.8 J4.A17 ; J4.A17 84.29,68.58 ; J4.A17 85.85,68.58 ; J4.A17 85.07,69.36 ; J7.B12 182.95,73.58 ; J7.B12 182.17,72.8 ; J7.B12 182.17,74.36 ; J7.B12 181.39,73.58 ; 112.47,62.8 J9.A22 ; J9.A22 111.69,63.58 ; J9.A22 113.25,63.58 ; J9.A22 112.47,64.36 ; J7.B2 182.17,86.36 ; J7.B2 182.95,85.58 ; J7.B2 182.17,84.8 ; J7.A13 186.67,73.36 ; J7.A13 186.67,71.8 ; J7.A13 185.89,72.58 ; J7.A13 187.45,72.58 ; 57.17,79.8 J3.B7 ; J3.B7 57.17,81.36 ; J3.B7 57.95,80.58 ; J3.B7 56.39,80.58 ; 87.07,72.8 J4.A12 ; J4.A12 87.07,74.36 ; J4.A12 86.29,73.58 ; J4.A12 87.85,73.58 ; J9.B7 108.75,80.58 ; J9.B7 107.19,80.58 ; J9.B7 107.97,81.36 ; J9.B7 107.97,79.8 ; J3.A10 61.67,78.36 ; J3.A10 60.89,77.58 ; J3.A10 61.67,76.8 ; J2.A11 35.05,76.58 ; J2.A11 34.27,75.8 ; J2.A11 34.27,77.36 ; J2.A11 33.49,76.58 ; J8.3 152.95,21.38 ; J8.3 150.39,21.38 ; J8.3 151.67,20.1 ; J8.3 151.67,22.66 ; J6.A17 162.05,68.58 ; J6.A17 160.49,68.58 ; J6.A17 161.27,69.36 ; J6.A17 161.27,67.8 ; J7.A12 189.45,73.58 ; J7.A12 188.67,74.36 ; J7.A12 187.89,73.58 ; J7.A12 188.67,72.8 ; 107.19,58.58 J9.B27 ; J9.B27 107.97,57.8 ; J9.B27 108.75,58.58 ; 8.09,80.58 J1.A7 ; J1.A7 8.87,81.36 ; J1.A7 8.87,79.8 ; J1.A7 9.65,80.58 ; 30.99,86.58 J2.B1 ; 160.07,25.6 J8.17 ; J8.17 158.79,26.88 ; J8.17 161.35,26.88 ; J8.17 160.07,28.16 ; J6.A1 162.05,86.58 ; J3.A12 62.45,73.58 ; J3.A12 61.67,72.8 ; J3.A12 60.89,73.58 ; J3.A12 61.67,74.36 ; J1.A11 8.87,77.36 ; J1.A11 9.65,76.58 ; J1.A11 8.09,76.58 ; J1.A11 8.87,75.8 ; 132.59,86.58 J5.B1 ; J2.A13 34.27,73.36 ; J2.A13 35.05,72.58 ; J2.A13 34.27,71.8 ; J2.A13 33.49,72.58 ; 34.27,79.8 J2.A7 ; J2.A7 34.27,81.36 ; J2.A7 33.49,80.58 ; J2.A7 35.05,80.58 ; J7.A1 187.45,86.58 ; J1.A12 10.87,74.36 ; J1.A12 10.87,72.8 ; J1.A12 11.65,73.58 ; J1.A12 10.09,73.58 ; J9.B22 106.75,63.58 ; J9.B22 105.97,64.36 ; J9.B22 105.19,63.58 ; J9.B22 105.97,62.8 ; J9.A7 111.25,80.58 ; J9.A7 110.47,81.36 ; J9.A7 109.69,80.58 ; J9.A7 110.47,79.8 ; 5.59,86.58 J1.B1 ; J9.A37 111.25,48.58 ; J9.A37 110.47,49.36 ; J9.A37 109.69,48.58 ; J9.A37 110.47,47.8 ; J3.B2 55.17,86.36 ; J3.B2 55.95,85.58 ; J3.B2 55.17,84.8 ; 58.89,72.58 J3.A13 ; J3.A13 59.67,71.8 ; J3.A13 59.67,73.36 ; J3.A13 60.45,72.58 ; 186.67,67.8 J7.A17 ; J7.A17 187.45,68.58 ; J7.A17 186.67,69.36 ; J7.A17 185.89,68.58 ; 109.69,58.58 J9.A27 ; J9.A27 111.25,58.58 ; J9.A27 110.47,57.8 ; J6.A7 161.27,81.36 ; J6.A7 161.27,79.8 ; J6.A7 162.05,80.58 ; J6.A7 160.49,80.58 ; 184.17,79.8 J7.B7 ; J7.B7 183.39,80.58 ; J7.B7 184.95,80.58 ; J7.B7 184.17,81.36 ; 30.99,80.58 J2.B7 ; J2.B7 31.77,79.8 ; J2.B7 32.55,80.58 ; J2.B7 31.77,81.36 ; 107.19,86.58 J9.B1 ; 135.09,76.58 J5.A11 ; J5.A11 135.87,75.8 ; J5.A11 135.87,77.36 ; J5.A11 136.65,76.58 ; J6.A2 163.27,86.36 ; J6.A2 163.27,84.8 ; J6.A2 162.49,85.58 ; J4.A10 87.85,77.58 ; J4.A10 87.07,76.8 ; J4.A10 86.29,77.58 ; J4.A10 87.07,78.36 ; 183.39,86.58 J7.B1 ; J3.A1 60.45,86.58 ; 10.09,77.58 J1.A10 ; J1.A10 11.65,77.58 ; J1.A10 10.87,76.8 ; J1.A10 10.87,78.36 ; 56.39,86.58 J3.B1 ; 20.46,75.56 J10.2 ; J10.2 22.72,75.56 ; J10.2 21.59,76.7 ; J10.2 21.59,74.43 ; J1.A1 9.65,86.58 ; 137.87,84.8 J5.A2 ; J5.A2 137.87,86.36 ; J5.A2 137.09,85.58 ; J9.A1 111.25,86.58 ; J8.18 164.27,28.16 ; J8.18 162.99,26.88 ; J8.18 164.27,25.6 ; J8.18 165.55,26.88 ; J2.B2 30.55,85.58 ; J2.B2 29.77,84.8 ; J2.B2 29.77,86.36 ; J7.A2 188.67,86.36 ; J7.A2 187.89,85.58 ; J7.A2 188.67,84.8 ; J14.5 66.09,20.32 ; 59.67,79.8 J3.A7 ; J3.A7 58.89,80.58 ; J3.A7 59.67,81.36 ; J3.A7 60.45,80.58 ; J5.A1 136.65,86.58 ; J5.B2 132.15,85.58 ; J5.B2 131.37,86.36 ; J5.B2 131.37,84.8 ; 65.41,23.55 J14.9 66.09,22.86 ; 81.79,86.58 J4.B1 ; J2.A1 35.05,86.58 ; J14.3 66.09,19.05
  vias: v1(160.66,57.15) v1(160.66,55.88) v1(160.66,54.61) v1(160.66,53.34) v1(160.66,52.07) v1(160.66,50.8) v1(160.66,49.53) v1(160.66,48.26) v1(175.89,57.15) v1(175.89,55.88) v1(175.89,54.61) v1(175.89,53.34) v1(175.89,52.07) v1(175.89,50.8) v1(175.89,49.53) v1(175.89,48.26)
CS_0: length 140.9
  TOP w0.254: J1.B11 5.37,75.58 5.37,69.08 4.87,68.58 3.96,68.58 3.17,67.8 3.17,48.26 v1(8.25,43.18) ; v1(8.25,41.27) 8.86,40.67 92.74,40.67 101.65,49.58 J9.B36
  BOTTOM w0.254: v1(8.25,43.18) v1(8.25,41.27)
CS_1: length 117.6
  TOP w0.254: v1(33.02,43.21) 33.47,43.65 33.49,43.65 33.71,43.87 89.59,43.87 102.3,56.58 J9.B29 ; J2.B11 30.77,75.58 30.77,69.08 30.27,68.58 29.36,68.58 28.57,67.8 28.57,59.69 33.02,55.25 v1(33.02,45.11)
  BOTTOM w0.254: v1(33.02,45.11) v1(33.02,43.21)
CS_2: length 90.6
  TOP w0.254: v1(57.78,48.29) 57.78,56.52 53.95,60.35 53.95,71.78 54.76,72.58 55.67,72.58 56.17,73.08 56.17,75.58 J3.B11 ; v1(57.78,46.38) 58.23,46.83 58.26,46.83 58.47,47.04 86.41,47.04 101.95,62.58 J9.B23
  BOTTOM w0.254: v1(57.78,48.29) v1(57.78,46.38)
CS_3: length 38.1
  TOP w0.254: J9.B14 104.6,71.58 95.88,62.87 90.17,62.87 85.95,67.09 85.95,70.94 85.43,71.46 84.23,71.46 83.45,72.24 83.45,72.94 82.93,73.46 82.23,73.46 81.74,73.95 81.74,75.75 J4.B11
CS_4: length 23
  TOP w0.254: J5.B11 131.82,76.58 126.82,71.58 J9.A14
CS_5: length 87.3
  TOP w0.254: J9.A23 113.31,62.58 132.71,43.18 153.67,43.18 155.57,45.09 155.57,71.8 156.36,72.58 157.27,72.58 158.13,73.44 158.13,75.94 J6.B11
CS_6: length 113.9
  TOP w0.254: J7.B11 183.53,75.94 183.53,73.44 182.67,72.58 181.76,72.58 180.97,71.8 180.97,43.18 177.8,40.01 130.18,40.01 113.61,56.57 112.91,56.57 112.9,56.58 J9.A29
FAN_1: length 29.8
  TOP w0.254: U2.28 49.3,25.5 49.56,25.76 49.56,26.64 48.12,28.08 30.79,28.08 29.84,27.14 29.84,25.4 29.68,25.23 R7.1
FAN_2: length 65.2
  TOP w0.254: U2.27 50.09,26.9 50.53,27.33 50.9,27.33 51.51,27.94 78.74,27.94 82.55,24.13 R6.1
INT_0: length 133.5
  TOP w0.254: v1(9.52,40.01) 93.34,40.01 100.92,47.58 J9.B38 ; J1.B13 7.62,71.33 7.62,68.18 9.52,66.28 v1(9.52,41.94)
  BOTTOM w0.254: v1(9.52,40.01) v1(9.52,41.94)
INT_1: length 105.7
  TOP w0.254: v1(36.83,43.21) 90.2,43.21 102.57,55.58 J9.B30 ; v1(36.83,45.11) 36.83,55.25 34.92,57.15 34.92,66.28 33.02,68.18 33.02,71.33 J2.B13
  BOTTOM w0.254: v1(36.83,45.11) v1(36.83,43.21)
INT_2: length 79.4
  TOP w0.254: J9.B24 102.22,61.58 87.02,46.38 v1(60.32,46.38) ; J3.B13 58.42,71.33 58.42,68.18 60.32,66.28 v1(60.32,48.29)
  BOTTOM w0.254: v1(60.32,48.29) v1(60.32,46.38)
INT_3: length 35
  TOP w0.254: J4.B13 82.57,72.54 84.02,71.09 84.02,68.04 89.83,62.23 96.52,62.23 104.87,70.58 J9.B15
INT_4: length 26.3
  TOP w0.254: J9.A15 127.09,70.58 131.44,74.93 132.08,74.93 133.37,73.64 J5.B13
INT_5: length 90.3
  TOP w0.254: J6.B13 160.02,71.33 160.02,68.18 161.93,66.28 161.93,64.77 161.29,64.14 158.75,64.14 156.84,62.23 156.84,46.99 159.27,44.57 159.27,43.06 158.75,42.55 132.36,42.55 113.32,61.58 J9.A24
INT_6: length 113.5
  TOP w0.254: J7.B13 185.42,71.33 185.42,68.2 187.32,66.29 187.32,64.14 186.69,63.5 183.51,63.5 182.25,62.23 182.25,41.91 179.7,39.37 129.54,39.37 113.33,55.58 J9.A30
MISO_0: length 138.1
  TOP w0.254: J1.B9 7.25,77.7 9.29,77.7 9.99,77 9.99,43.98 12.06,41.91 91.44,41.91 101.11,51.58 J9.B34
MISO_1: length 110.4
  TOP w0.254: J9.B26 102.76,59.58 88.26,45.09 39.37,45.09 38.1,46.36 38.1,74.3 34.69,77.7 32.65,77.7 J2.B9
MISO_2: length 83.5
  TOP w0.254: J9.B18 104.41,67.58 85.09,48.26 65.41,48.26 62.86,50.8 62.86,74.93 60.09,77.7 58.05,77.7 J3.B9
MISO_3: length 53.6
  TOP w0.254: v1(87.31,63.82) 86.61,63.12 83.27,63.12 82.15,64.24 82.15,66.51 83.62,67.98 83.62,69.33 83.36,69.58 82.07,69.58 81.07,70.58 79.63,70.58 79.38,70.83 79.38,77.85 80.11,78.58 J4.B9 ; v1(106.04,76.2) 104.77,76.2 v1(93.34,64.77)
  BOTTOM w0.254: J9.B11 106.42,76.58 v1(106.04,76.2) ; v1(87.31,63.82) 89.09,65.6 91.55,65.6 91.93,65.22 92.9,65.22 v1(93.34,64.77)
MISO_4: length 26.7
  TOP w0.254: J5.B9 130.65,78.58 125.09,73.03 116.21,73.03 112.65,76.58 J9.A11
MISO_5: length 88.2
  TOP w0.254: v1(151.76,45.09) 151.13,44.45 133.98,44.45 115.38,63.05 115.38,64.67 J9.A18 ; J6.B9 158.77,77.49 158.74,77.46 158.41,77.46 154.94,73.99 154.94,45.72 v1(154.31,45.09)
  BOTTOM w0.254: v1(154.31,45.09) v1(151.76,45.09)
MISO_6: length 112.9
  TOP w0.254: J9.A26 113.32,59.58 131.63,41.27 175.26,41.27 v1(177.16,43.18) ; J7.B9 183.57,77.98 183.57,77.52 180.34,74.3 180.34,43.81 v1(179.7,43.18)
  BOTTOM w0.254: v1(179.7,43.18) v1(177.16,43.18)
MOSI_0: length 146.8
  TOP w0.254: v1(3.81,45.09) 3.17,45.09 1.27,46.99 1.27,75.89 3.84,78.46 4.16,78.46 4.37,78.67 J1.B8 ; v1(10.79,45.09) 13.33,42.55 90.8,42.55 100.84,52.58 J9.B33
  BOTTOM w0.254: v1(3.81,45.09) v1(10.79,45.09)
MOSI_1: length 116.7
  TOP w0.254: J2.B8 29.77,78.67 29.56,78.46 29.24,78.46 27.3,76.53 27.3,60.62 27.33,60.6 27.33,60.05 27.3,60.03 27.3,54.61 v1(30.48,51.44) ; v1(38.76,51.44) 40,51.44 45.72,45.72 87.63,45.72 102.49,60.58 J9.B25
  BOTTOM w0.254: v1(30.48,51.44) v1(38.76,51.44)
MOSI_2: length 91.7
  TOP w0.254: v1(54.61,57.79) 52.1,60.3 52.1,60.6 52.07,60.62 52.07,61.3 52.1,61.32 52.1,61.87 52.07,61.89 52.07,75.89 54.64,78.46 54.96,78.46 55.17,78.67 J3.B8 ; v1(63.53,57.79) 63.53,51.41 66.04,48.9 84.43,48.9 105.12,69.58 J9.B16
  BOTTOM w0.254: v1(54.61,57.79) v1(63.53,57.79)
MOSI_3: length 47.7
  TOP w0.203: v1(80.64,64.77) 78.99,66.42 78.99,78 J4.B8
  TOP w0.254: v1(86.36,64.77) 85.72,64.77 85.09,64.14 v1(83.19,64.14) ; v1(93.34,66.04) 93.34,66.67 104.25,77.58 J9.B10
  BOTTOM w0.254: v1(93.34,66.04) 87.63,66.04 v1(86.36,64.77) ; v1(80.64,64.77) 82.55,64.77 v1(83.19,64.14)
MOSI_4: length 23
  TOP w0.254: J5.B8 130.38,79.58 124.46,73.66 116.39,73.66 J9.A10
MOSI_5: length 86.1
  TOP w0.254: J9.A16 116.2,65.84 116.2,63.5 134.62,45.09 149.22,45.09 153.67,49.53 153.67,75.89 156.24,78.46 156.56,78.46 156.77,78.67 J6.B8
MOSI_6: length 111.8
  TOP w0.254: J9.A25 113.41,60.58 132.08,41.91 172.72,41.91 179.07,48.26 179.07,75.89 181.64,78.46 181.96,78.46 182.17,78.67 J7.B8
NRST: length 51.4
  TOP w0.254: v1(62.86,10.8) 57.15,10.8 55.88,12.06 54.91,12.06 54.88,12.09 39.98,12.09 38.1,13.97 38.1,19.68 39.14,20.72 U2.4
  BOTTOM w0.254: J14.10 62.86,21.59 v1(62.86,10.8)
PRSNT_0: length 86.9
  TOP w0.254: v1(1.27,45.09) 15.24,31.12 v1(43.18,31.12) ; v1(43.18,19.05) 44.57,19.05 U2.6 ; J1.B17 5.74,67.95 5.74,49.56 v1(4.44,48.26)
  BOTTOM w0.254: v1(4.44,48.26) v1(1.27,45.09) ; v1(43.18,31.12) v1(43.18,19.05)
PRSNT_1: length 64.3
  TOP w0.254: v1(43.18,17.78) 43.72,18.32 U2.7 ; v1(34.92,39.34) v1(44.42,39.34) ; J2.B17 31.14,67.95 31.14,59.03 34.92,55.25 v1(34.92,45.11)
  BOTTOM w0.254: v1(43.18,17.78) 44.42,19.02 v1(44.42,39.34) ; v1(34.92,45.11) v1(34.92,39.34)
PRSNT_2: length 68.3
  TOP w0.254: J3.B17 56.54,67.95 56.54,59.66 59.05,57.15 v1(59.05,48.29) ; v1(44.45,16.51) 44.45,17.32 U2.8 ; v1(59.05,39.34) v1(45.75,39.34)
  BOTTOM w0.254: v1(45.75,39.34) 45.75,17.81 v1(44.45,16.51) ; v1(59.05,48.29) v1(59.05,39.34)
PRSNT_3: length 91.6
  TOP w0.254: J4.B17 81.45,67.46 81.45,63.97 81.94,63.47 v1(81.94,49.56) ; v1(45.72,14.61) 46.09,14.98 U2.9 ; v1(46.99,38.1) 81.69,38.1 81.94,38.35 v1(81.94,39.34)
  BOTTOM w0.254: v1(46.99,38.1) 46.33,37.44 46.33,15.21 v1(45.72,14.61) ; v1(81.94,49.56) v1(81.94,39.34)
PRSNT_4: length 144
  TOP w0.254: v1(46.99,32.39) 49.87,32.39 49.89,32.41 50.44,32.41 50.46,32.39 115.57,32.39 121.89,38.71 v1(135.89,38.71) ; v1(135.89,45.75) 135.89,52.07 132.74,55.22 132.74,67.95 J5.B17 ; U2.10 46.9,14.51 v1(46.35,13.97)
  BOTTOM w0.254: v1(46.99,32.39) 46.99,26.97 46.96,26.94 46.96,26.4 46.99,26.37 46.99,14.9 46.96,14.88 46.96,14.58 v1(46.35,13.97) ; v1(135.89,45.75) v1(135.89,38.71)
PRSNT_5: length 166.7
  TOP w0.254: v1(47.62,13.36) 47.62,15 47.7,15.07 U2.11 ; v1(48.26,31.12) 49.87,31.12 49.89,31.09 50.44,31.09 50.46,31.12 118.11,31.12 122.55,35.56 156.84,35.56 158.14,36.86 v1(158.14,38.71) ; v1(158.14,43.81) 156.21,45.75 156.21,64.14 158.12,66.04 158.12,67.92 J6.B17
  BOTTOM w0.254: v1(47.62,13.36) 47.62,14 47.99,14.36 48.07,14.36 48.26,14.54 48.26,25.74 48.23,25.76 48.23,26.31 48.26,26.33 48.26,26.37 48.29,26.4 48.29,26.94 48.26,26.97 v1(48.26,31.12) ; v1(158.14,43.81) v1(158.14,38.71)
PRSNT_6: length 183.9
  TOP w0.254: U2.12 48.49,14.91 v1(49.33,14.07) ; v1(49.53,29.85) 118.74,29.85 123.82,34.92 136.23,34.92 136.25,34.95 157.51,34.95 161.26,38.71 v1(179.7,38.71) ; v1(179.7,40.64) 181.61,42.55 181.61,63.5 183.51,65.41 183.51,67.92 J7.B17
  BOTTOM w0.254: v1(49.33,14.07) 49.33,14.71 49.53,14.9 49.53,25.74 49.64,25.85 49.64,26.22 49.53,26.33 v1(49.53,29.85) ; v1(179.7,40.64) v1(179.7,38.71)
PRSNT_MSTR: length 69.8
  TOP w0.254: v1(55.88,33.66) 102.05,33.66 J9.B48 ; U2.18 54.15,18.32 54.24,18.42 54.31,18.42 54.34,18.39 54.88,18.39 54.91,18.42 v1(55.88,18.42)
  BOTTOM w0.254: v1(55.88,18.42) 55.88,21.29 55.85,21.32 55.85,21.86 55.88,21.89 v1(55.88,33.66)
PS_ON: length 149
  TOP w0.254: v1(48.89,26.04) 48.49,25.63 U2.29 ; J8.16 154.52,26.88 149.57,21.94 149.57,20.32 148.3,19.05 135.89,19.05 134.9,18.06 95.25,18.06 92.07,14.89 92.07,9.52 90.48,7.93 90.48,2.85 90.17,2.54 87.29,2.54 87.27,2.51 86.72,2.51 86.7,2.54 85.66,2.54 75.53,12.67 66.65,12.67 62.86,8.89 v1(48.89,8.89)
  BOTTOM w0.254: v1(48.89,8.89) 48.89,13.3 48.48,13.72 48.48,14.19 48.89,14.61 v1(48.89,26.04)
PWM_1: length 52.9
  TOP w0.254: U2.22 54.15,21.52 54.22,21.59 v1(56.51,21.59) ; J12.4 23.49,15.88 27.94,11.43 v1(54.61,11.43)
  BOTTOM w0.254: v1(56.51,21.59) 57.15,20.96 57.15,18.42 54.61,15.88 v1(54.61,11.43)
PWM_2: length 79.3
  TOP w0.254: U2.21 57.38,20.72 61.59,16.51 66.67,16.51 67.31,17.15 67.31,19.05 67.94,19.69 123.82,19.69 J13.4
PWR_OK: length 167.8
  TOP w0.203: 140.8,17.61 140.8,17.57
  TOP w0.254: 140.8,17.61 141.6,18.42 169.71,18.42 J8.8 ; U2.30 47.7,25.57 47.62,25.64 v1(47.62,26.67) ; R1.1 141.14,17.24 140.8,17.57 140.38,17.15 95.43,17.15 92.56,14.27 92.56,9.37 90.89,7.7 90.89,2.49 90.3,1.91 85.72,1.91 75.56,12.06 67.31,12.06 63.5,8.26 49.19,8.26 49.17,8.23 48.62,8.23 48.6,8.26 v1(47.62,8.26)
  BOTTOM w0.254: v1(47.62,8.26) 46.92,8.96 46.92,13.6 47.02,13.7 47.02,14.06 47.62,14.67 v1(47.62,26.67)
SCK_0: length 143.2
  TOP w0.254: J1.B10 1.91,75.11 1.91,48.26 8.23,41.94 8.53,41.94 9.19,41.27 92.07,41.27 101.38,50.58 J9.B35
SCK_1: length 114.8
  TOP w0.254: J9.B28 102.03,57.58 88.9,44.45 32.38,44.45 31.75,45.09 31.75,55.25 27.94,59.06 27.94,75.75 J2.B10
SCK_2: length 90
  TOP w0.254: J3.B10 53.34,75.75 53.34,60.33 57.12,56.54 57.12,48.01 57.15,47.99 57.15,47.88 57.4,47.62 85.72,47.62 102.68,64.58 J9.B21
SCK_3: length 44
  TOP w0.254: J4.B10 85.83,77.58 86.71,76.7 87.83,76.7 87.99,76.86 88.54,76.86 89.51,75.89 89.51,64.5 89.53,64.47 89.53,64.14 90.17,63.5 91.78,63.5 91.8,63.47 92.35,63.47 92.37,63.5 95.25,63.5 104.33,72.58 J9.B13
SCK_4: length 23
  TOP w0.254: J5.B10 126.37,72.58 J9.A13
SCK_5: length 85.7
  TOP w0.254: J9.A21 112.71,64.58 133.48,43.81 151.76,43.81 154.31,46.36 154.31,75.11 J6.B10
SCK_6: length 110
  TOP w0.254: J7.B10 179.7,75.11 179.7,44.45 175.89,40.64 130.81,40.64 113.87,57.58 J9.A28
SCL: length 454.7
  TOP w0.203: v1(64.13,60.33) v1(81.28,60.33) ; v1(88.26,62.87) v1(88.26,60.33) ; R5.2 72.86,15.88 69.85,15.88 69.22,15.24 60.58,15.24 56.77,19.05 v1(54.61,19.05) ; v1(39.37,60.33) v1(51.43,60.33)
  TOP w0.254: J1.A9 11.11,78.58 12.06,77.63 v1(12.06,60.33) 12.06,50.8 16.51,46.36 v1(16.51,43.21) ; J5.A9 136.47,77.98 136.47,77.52 137.16,76.83 137.16,75.13 134.52,72.49 ; v1(134.74,68.06) 143.11,59.69 v1(152.37,59.69) ; v1(53.97,36.2) 19.66,36.2 v1(16.51,39.34) ; v1(64.13,60.33) 64.13,75.56 62.86,76.84 62.86,78.11 62.39,78.58 J3.A9 ; 134.52,72.49 134.62,72.39 v1(134.62,71.64) ; 134.52,72.49 133.49,71.46 133.01,71.46 132.03,70.48 128.27,70.48 127.63,69.85 v1(118.11,69.85) 117.47,69.85 117.45,69.88 116.57,69.88 116.18,69.49 116.18,67.34 116.67,66.84 116.67,64.3 v1(118.11,62.87) ; v1(118.11,74.32) 118.11,75.56 114.1,79.58 J9.A8 ; J7.A9 189.39,78.58 189.87,78.11 189.87,65.41 187.32,62.87 184.15,62.87 182.91,61.62 v1(182.91,59.69) ; J6.A9 163.68,78.58 164.47,77.8 164.47,66.04 161.93,63.5 159.38,63.5 157.51,61.62 v1(157.51,59.69) v1(178.41,59.69) ; v1(90.17,64.77) 90.17,75.89 87.48,78.58 J4.A9 ; U2.19 53.22,19.05 v1(54.61,19.05) ; v1(39.37,60.33) 39.37,76.2 36.99,78.58 J2.A9 ; v1(14.6,60.33) v1(26.67,60.33)
  BOTTOM w0.203: v1(90.17,64.77) v1(88.26,62.87) ; v1(51.43,60.33) v1(64.13,60.33) ; v1(81.28,60.33) v1(88.26,60.33)
  BOTTOM w0.254: v1(53.97,36.2) 53.97,19.69 v1(54.61,19.05) ; v1(16.51,43.21) v1(16.51,39.34) ; v1(134.74,68.06) 134.74,71.52 v1(134.62,71.64) ; v1(157.51,59.69) v1(152.37,59.69) ; v1(118.11,74.32) v1(118.11,69.85) ; v1(26.67,60.33) v1(39.37,60.33) ; v1(178.41,59.69) v1(182.91,59.69) ; v1(118.11,62.87) 114.94,59.69 114.3,59.69 113.19,58.58 111.97,58.58 110.97,59.58 107.47,59.58 106.47,58.58 104.61,58.58 102.87,60.33 v1(88.26,60.33) ; v1(12.06,60.33) v1(14.6,60.33)
SDA: length 447.5
  TOP w0.203: v1(55.22,19.71) 57.12,19.71 60.96,15.88 69.35,15.88 70.15,16.68 R4.2 ; v1(65.41,61.59) v1(81.28,61.59) ; v1(40.64,61.59) v1(51.43,61.59)
  TOP w0.254: v1(92.07,64.14) 92.07,74.57 J4.A8 ; v1(152.37,60.96) 147.95,60.96 139.57,69.34 ; v1(26.03,61.59) 26.03,75.56 24.13,77.47 13.33,77.47 ; v1(55.22,19.71) 54.36,19.71 54.15,19.92 U2.20 ; 139.57,69.34 138.81,68.58 137.37,68.58 136.37,69.58 132.87,69.58 131.87,68.58 120.01,68.58 119.41,69.19 117.84,69.19 117.81,69.22 v1(116.84,69.22) 116.84,67.94 117.47,67.31 v1(117.47,64.77) ; 139.57,69.34 139.06,69.85 139.06,78.38 J5.A8 ; v1(183.57,60.96) 187.32,60.96 190.5,64.14 190.5,78.6 189.52,79.58 J7.A8 ; J3.A8 62.52,79.58 63.5,78.6 63.5,77.47 65.41,75.56 v1(65.41,61.59) ; 13.33,77.47 11.83,78.98 11.47,78.98 J1.A8 10.23,79.58 ; 13.33,77.47 13.33,50.8 17.78,46.35 v1(17.78,43.21) ; v1(55.22,37.22) 19.9,37.22 v1(17.78,39.34) ; v1(178.41,60.96) 165.54,60.96 ; 165.54,60.96 v1(158.17,60.96) ; 165.54,60.96 165.74,61.15 165.74,77.11 J6.A8 ; J2.A8 37.12,79.58 40.64,76.06 v1(40.64,61.59) ; J9.A9 113.19,78.58 116.41,75.36 116.41,74.75 v1(116.84,74.32)
  BOTTOM w0.203: v1(51.43,61.59) v1(65.41,61.59) ; v1(92.07,64.14) 92.07,61.59 v1(81.28,61.59) ; v1(26.03,61.59) v1(40.64,61.59) ; v1(116.84,74.32) v1(116.84,69.22)
  BOTTOM w0.254: v1(55.22,37.22) v1(55.22,19.71) ; v1(117.47,64.77) 113.29,60.58 111.97,60.58 110.97,61.58 107.47,61.58 106.47,60.58 105.56,60.58 104.54,61.59 92.07,61.59 ; v1(158.17,60.96) v1(152.37,60.96) ; v1(178.41,60.96) v1(183.57,60.96) ; v1(17.78,43.21) v1(17.78,39.34)
SWCLK: length 12.7
  TOP w0.203: J14.4 61.59,19.05 57.52,23.12 U2.24
SWDIO: length 12.9
  TOP w0.203: U2.23 57.06,22.32 61.59,17.78 J14.2
TACH_1: length 54.3
  TOP w0.254: J12.3 23.49,18.42 26.71,15.2 31.1,15.2 31.75,15.85 31.75,16.44 28.57,19.62 28.57,27.3 29.84,28.58 48.26,28.58 48.67,28.17 v1(50.8,28.17) ; v1(50.8,26.67) 50.8,25.67 50.89,25.57 U2.26
  BOTTOM w0.254: v1(50.8,28.17) v1(50.8,26.67)
TACH_2: length 80.3
  TOP w0.254: U2.25 51.7,26.3 52.07,26.67 78.74,26.67 83.19,22.23 123.82,22.23 J13.3
TEMP_1: length 99.3
  TOP w0.254: v1(19.05,39.34) 20.46,37.93 v1(40.81,37.93) ; v1(40.81,14.44) R2.1 43.65,12.7 49.53,12.7 50.09,13.26 U2.14 ; J10.1 13.97,70.48 13.97,60.62 13.94,60.6 13.94,60.05 13.97,60.03 13.97,51.44 18.19,47.22 18.19,44.07 v1(19.05,43.21)
  BOTTOM w0.254: v1(19.05,43.21) v1(19.05,39.34) ; v1(40.81,14.44) v1(40.81,37.93)
TEMP_2: length 166.9
  TOP w0.254: U2.15 50.8,15.98 v1(50.8,14.61) 52.42,14.61 52.59,14.77 R3.1 ; v1(145.41,38.71) 145.41,38.07 144.17,36.83 121.92,36.83 116.84,31.75 v1(50.16,31.75) ; J11.1 147.32,73.66 151.13,73.66 153.03,71.75 153.03,51.44 147.98,46.38 146.08,46.38 145.89,46.19 145.86,46.19 v1(145.41,45.75)
  BOTTOM w0.254: v1(50.16,31.75) 50.16,30.14 50.43,29.88 50.43,29.27 50.05,28.89 50.05,15.35 v1(50.8,14.61) ; v1(145.41,45.75) v1(145.41,38.71)
N16591: length 72.2
  TOP w0.508: F2.1 182.19,35.62 183.45,34.35 184.03,34.35 187.37,31.01 187.37,23.48 J8.12
  TOP w2.54: J8.2 J8.1 J8.13 143.27,29.6 144.78,31.12 159.38,31.12 164.26,35.99 180.83,35.99 181.03,36.2 F2.1
N16670: length 31.4
  TOP w0.203: J8.23 186.55,26.88 ; J8.23 185.27,28.16 ; J8.23 185.27,25.6 ; J8.23 183.99,26.88 ; F1.1 175.95,33.5 ; F1.1 175.95,30 ; F1.1 177.13,31.75 ; F1.1 174.78,31.75 ; 176.87,25.6 J8.21 ; J8.21 178.15,26.88 ; J8.21 176.87,28.16 ; J8.21 175.59,26.88 ; 181.07,25.6 J8.22 ; J8.22 182.35,26.88 ; J8.22 179.79,26.88 ; J8.22 181.07,28.16 ; J8.4 155.87,22.66 ; J8.4 157.15,21.38 ; J8.4 155.87,20.1 ; J8.4 154.59,21.38 ; 162.99,21.38 J8.6 ; J8.6 164.27,22.66 ; J8.6 164.27,20.1 ; J8.6 165.55,21.38
N16786: length 16.1
  TOP w0.203: J8.11 186.55,21.38 ; J8.11 183.99,21.38 ; J8.11 185.27,20.1 ; J8.11 185.27,22.66 ; J8.10 182.35,21.38 ; J8.10 181.07,20.1 ; J8.10 179.79,21.38 ; J8.10 181.07,22.66 ; F3.1 194.16,32.33 ; F3.1 192.41,31.15 ; F3.1 192.41,33.5 ; F3.1 190.65,32.33
N17268: length 3.5
  TOP w0.254: D1.2 R1.2
N21003: length 14.3
  TOP w0.203: C4.2 32.18,23.33 32.51,23.01 X1.1 34.09,23.01 35.57,21.52 U2.3
N21021: length 10.9
  TOP w0.203: U2.2 41.18,22.32 40,23.5 40,24.13 38.88,25.25 X1.3 37.44,26.03 37.63,26.23 C3.2
N84664: length 11.2
  TOP w0.508: J13.1 122.28,25.76 Q1.1
N84732: length 15.4
  TOP w0.254: Q2.1 28.3,16.15 20.95,23.5 J12.1
N86028: length 4.4
  TOP w0.203: Q1.2 114.03,23.77 113.66,24.13 R6.2
N86032: length 2.4
  TOP w0.203: Q2.2 31.75,18.82 31.28,19.29 R7.2

## Copper pours and planes (outline as drawn; the poured copper is in the pictures)
3V3 on TOP: 184.15,40.64 184.15,34.29 189.87,34.29 189.87,40.64
3V3 on TOP: 0,99.06 0,84.45 3.98,84.45 3.98,83.82 5.08,83.82 5.08,84.45 10.45,84.45 10.45,83.82 11.43,83.82 11.43,84.45 29.26,84.45 29.26,83.82 30.48,83.82 30.48,84.45 35.57,84.45 35.57,83.82 36.83,83.82 36.83,84.45 54.8,84.45 54.8,83.82 55.88,83.82 55.88,84.45 61.39,84.45 61.39,83.82 62.23,83.82 62.23,84.45 196.85,84.45 196.85,99.06
3V3 on BOTTOM: 189.87,87.63 196.85,87.63 196.85,34.29 184.15,34.29 184.15,56.52 191.13,63.5 191.13,83.19 189.87,84.45
3V3_STBY on TOP: 74.29,19.05 94.61,19.05 94.61,18.42 91.44,15.24 91.44,9.52 90.17,8.26 90.17,3.18 88.9,3.18 88.9,6.35 82.55,6.35 74.29,14.61
5V0 on TOP: 164.47,33.66 173.99,33.66 173.99,28.58 160.66,28.58 160.02,29.21
5V0 on BOTTOM: 0,84.45 0,99.06 196.85,99.06 196.85,87.63 189.89,87.63 189.89,84.45
5V0 on BOTTOM: 163.83,33.66 163.83,29.21 170.18,29.21 170.18,33.66 175.26,33.66 175.26,85.09 166.37,85.09 166.37,62.23 161.93,57.79 161.93,35.56
12V0 on TOP: 0,84.45 0,78.11 190.77,78.11 190.77,63.14 186.06,58.42 184.78,58.42 184.78,41.27 190.5,41.27 190.5,34.29 196.85,34.29 196.85,84.45
GND on TOP: 160.02,57.79 160.02,46.99 176.53,46.99 176.53,57.79
GND on BOTTOM: 0,78.11 0,0 196.85,0 196.85,78.11 189.23,78.11 189.23,87.63 187.32,87.63 187.32,83.82 183.6,83.82 183.6,87.63 181.73,87.63 181.73,78.11 163.83,78.11 163.83,87.63 161.93,87.63 161.93,83.82 158.37,83.82 158.37,87.63 156.28,87.63 156.28,78.11 138.43,78.11 138.43,87.63 136.52,87.63 136.52,83.82 132.94,83.82 132.94,87.63 130.82,87.63 130.82,78.11 113.03,78.11 113.03,87.63 111.12,87.63 111.12,83.82 107.46,83.82 107.46,87.63 105.39,87.63 105.39,78.11 87.63,78.11 87.63,87.63 85.72,87.63 85.72,83.82 82.12,83.82 82.12,87.63 80.09,87.63 80.09,78.11 62.23,78.11 62.23,87.63 60.32,87.63 60.32,83.82 56.64,83.82 56.64,87.63 54.75,87.63 54.75,78.11 36.83,78.11 36.83,87.63 34.92,87.63 34.92,83.82 31.26,83.82 31.26,87.63 29.34,87.63 29.34,78.11 11.43,78.11 11.43,87.63 9.52,87.63 9.52,83.82 5.89,83.82 5.89,87.63 3.87,87.63 3.87,78.11
N16670 on TOP: 153.67,19.69 166.37,19.69 166.37,22.86 187.32,22.86 187.32,28.58 182.71,28.58 182.71,33.66 174.62,33.66 174.62,25.4 153.67,25.4
N16786 on TOP: 189.23,33.66 196.85,33.66 196.85,10.8 179.07,10.8 179.07,17.78 179.16,17.78 179.16,22.86 187.32,22.86 187.32,19.69 191.13,19.69 191.13,28.58 189.87,29.85 189.23,29.85

## Text on the board
Ref Des/Silkscreen Top: FAN1 | TEMP1 | DAQ Backplane Board v0.1 | Chris Elwood 1/2019 | SWD | FAN2 | TEMP2
